# Altium PCB Dogfish3D R1.0.PcbDoc (part 1 of 2)
Units mil, origin at the board's own origin, x right, y up, seen from the top; angles counter-clockwise.
Board outline 6000 x 4000 mil, 4 copper layers (Top Layer, Groun Plane, Power Plane, Bottom Layer), stack 61.73 mil thick; 227 components, 145 nets, 705 pads, 165 vias.
Unrouted connection lines stored in the file: 286.
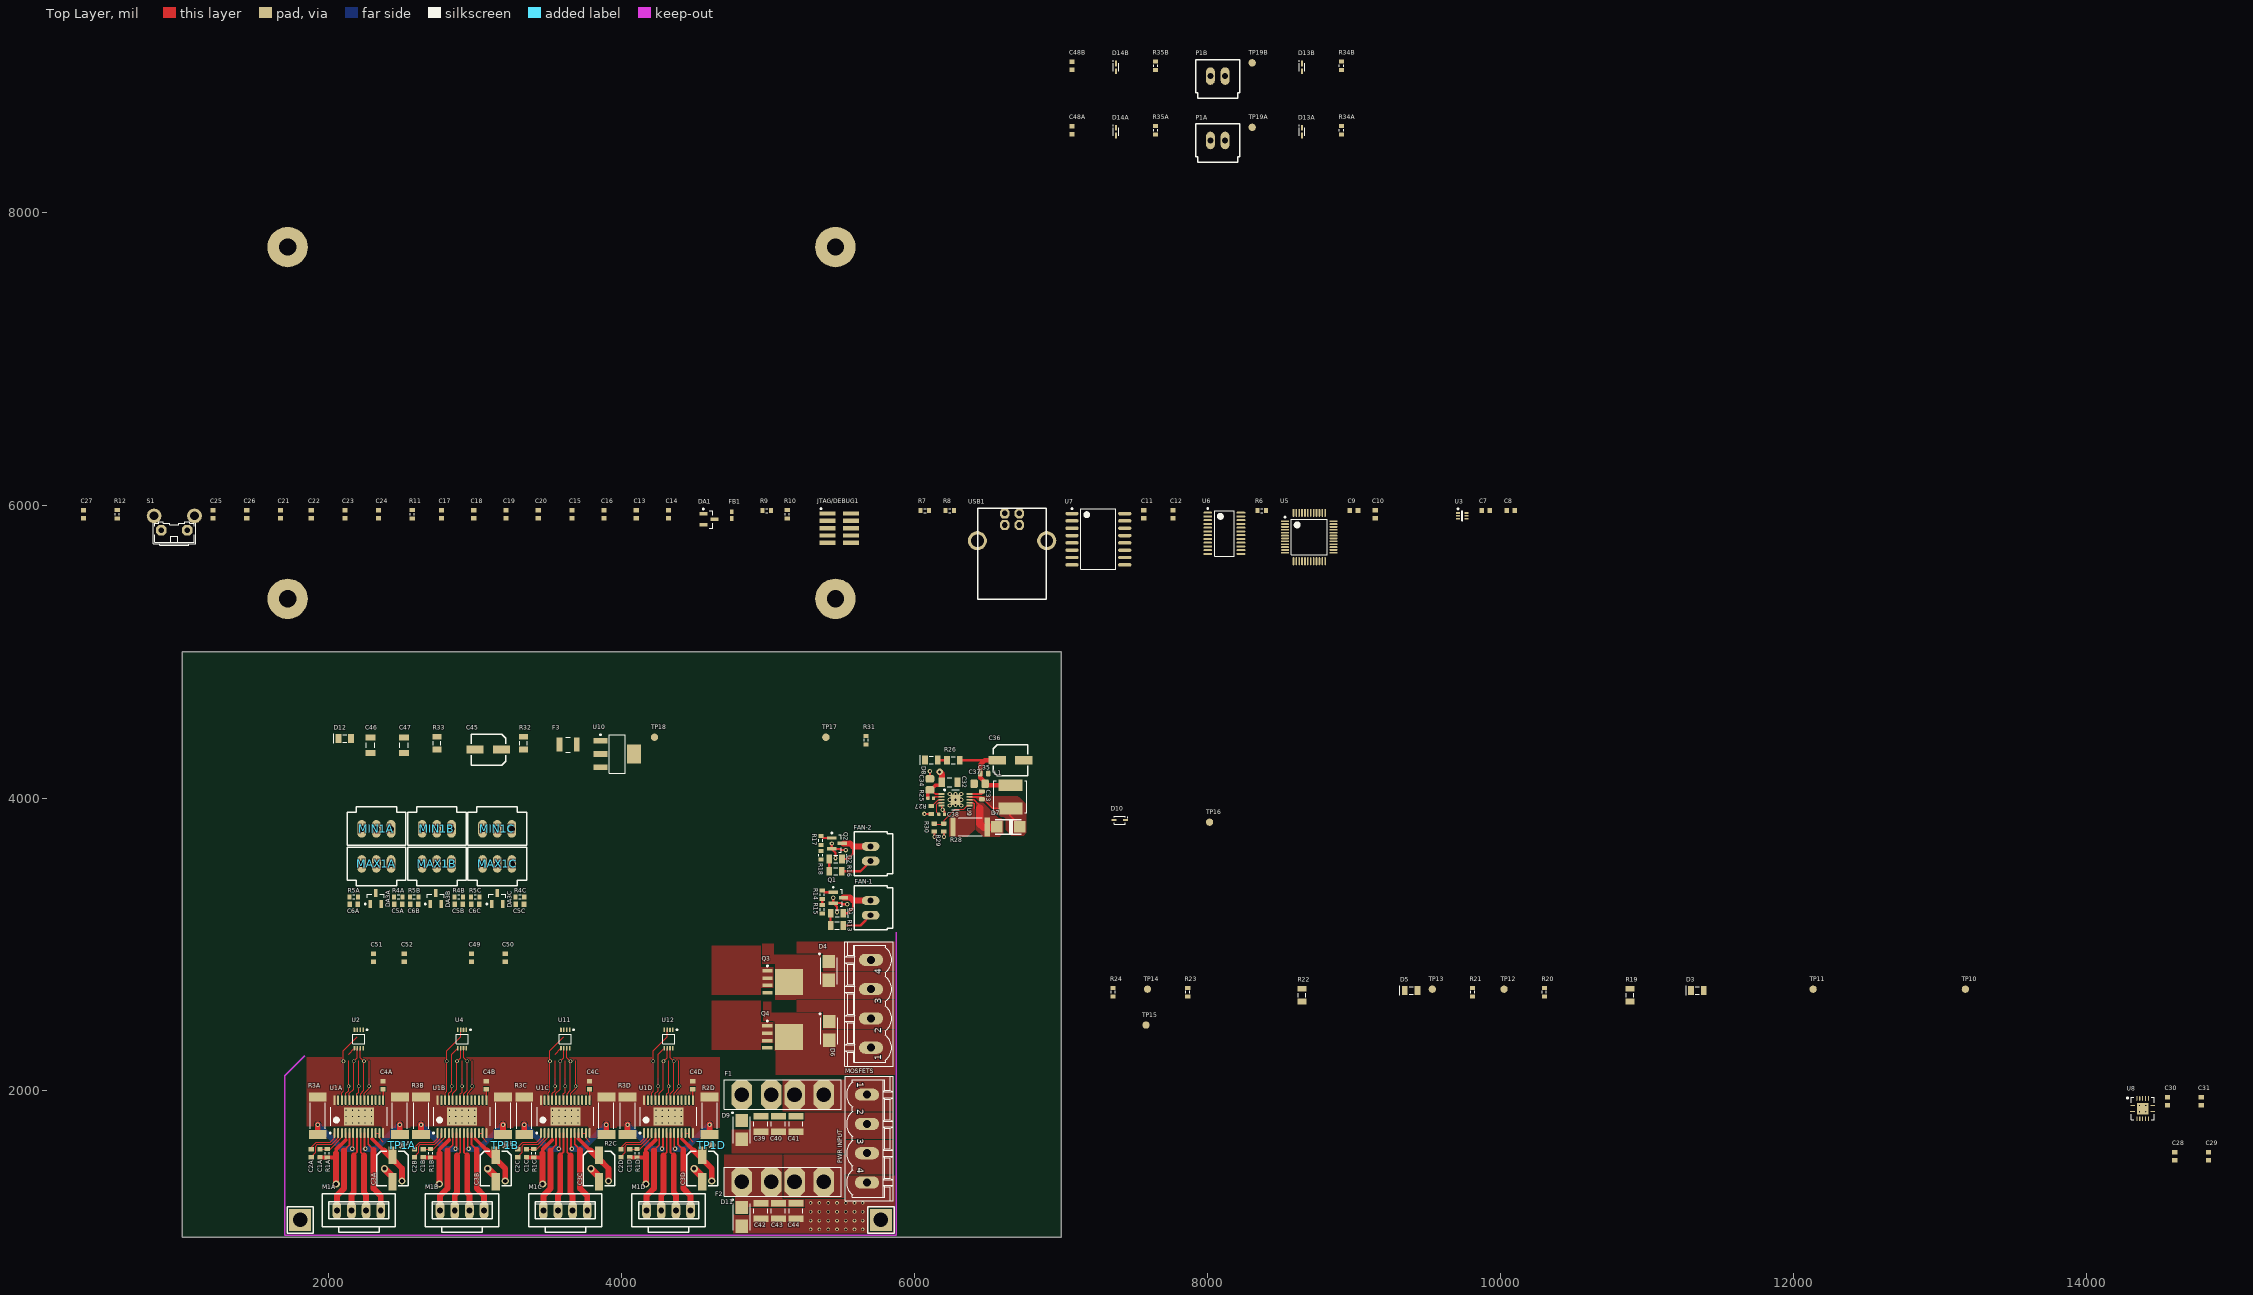
[diagram p0: Top Layer view]
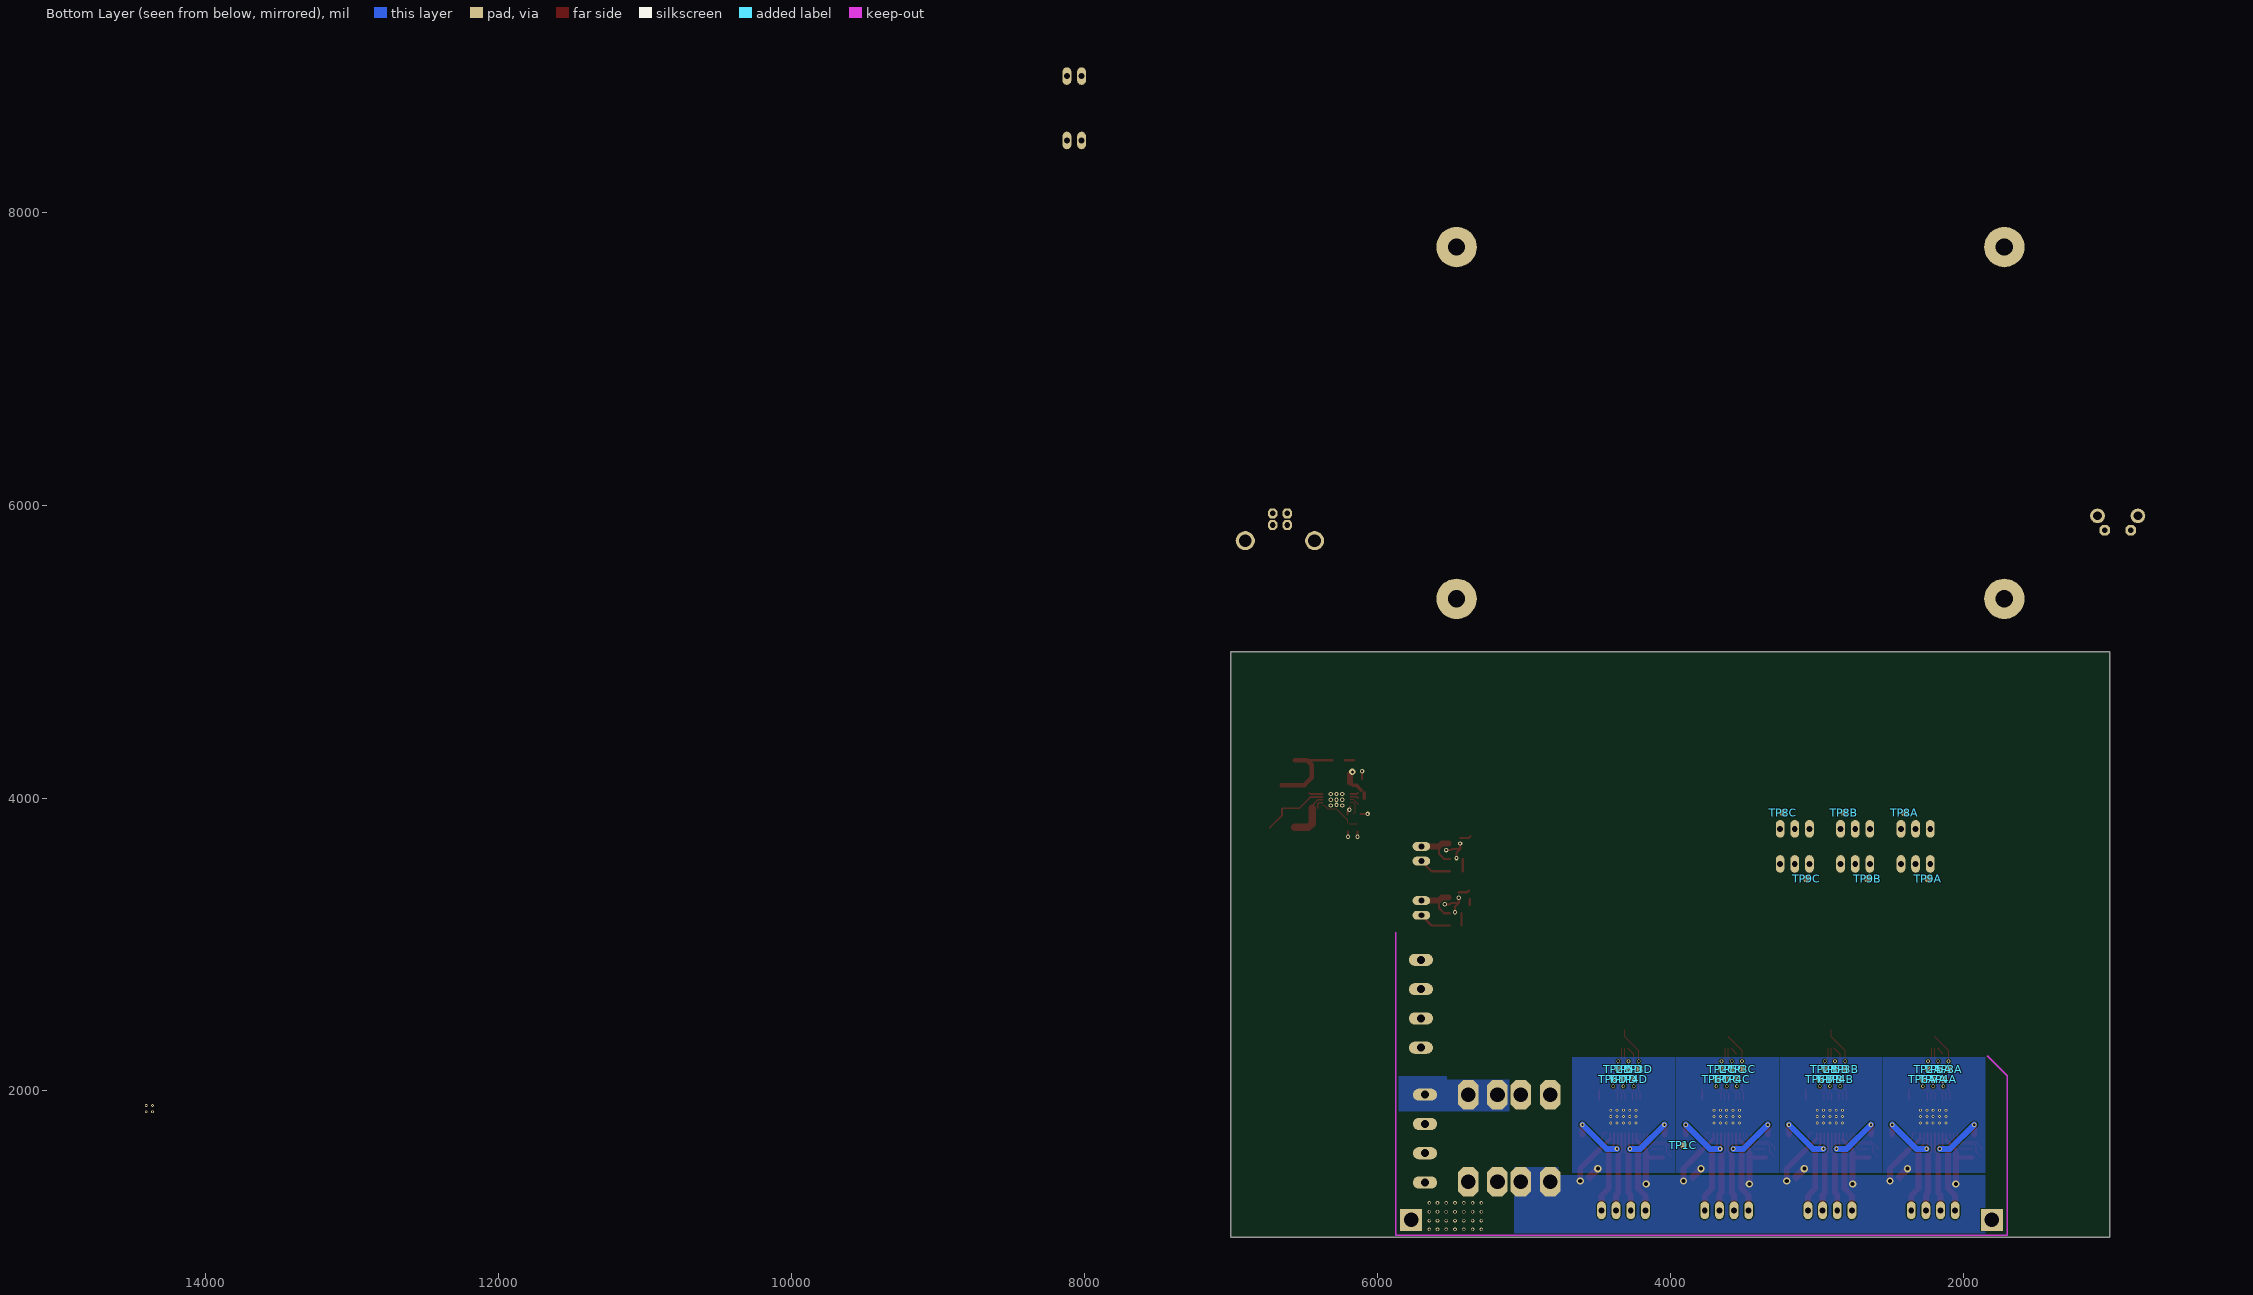
[diagram p1: Bottom Layer view, seen from below]
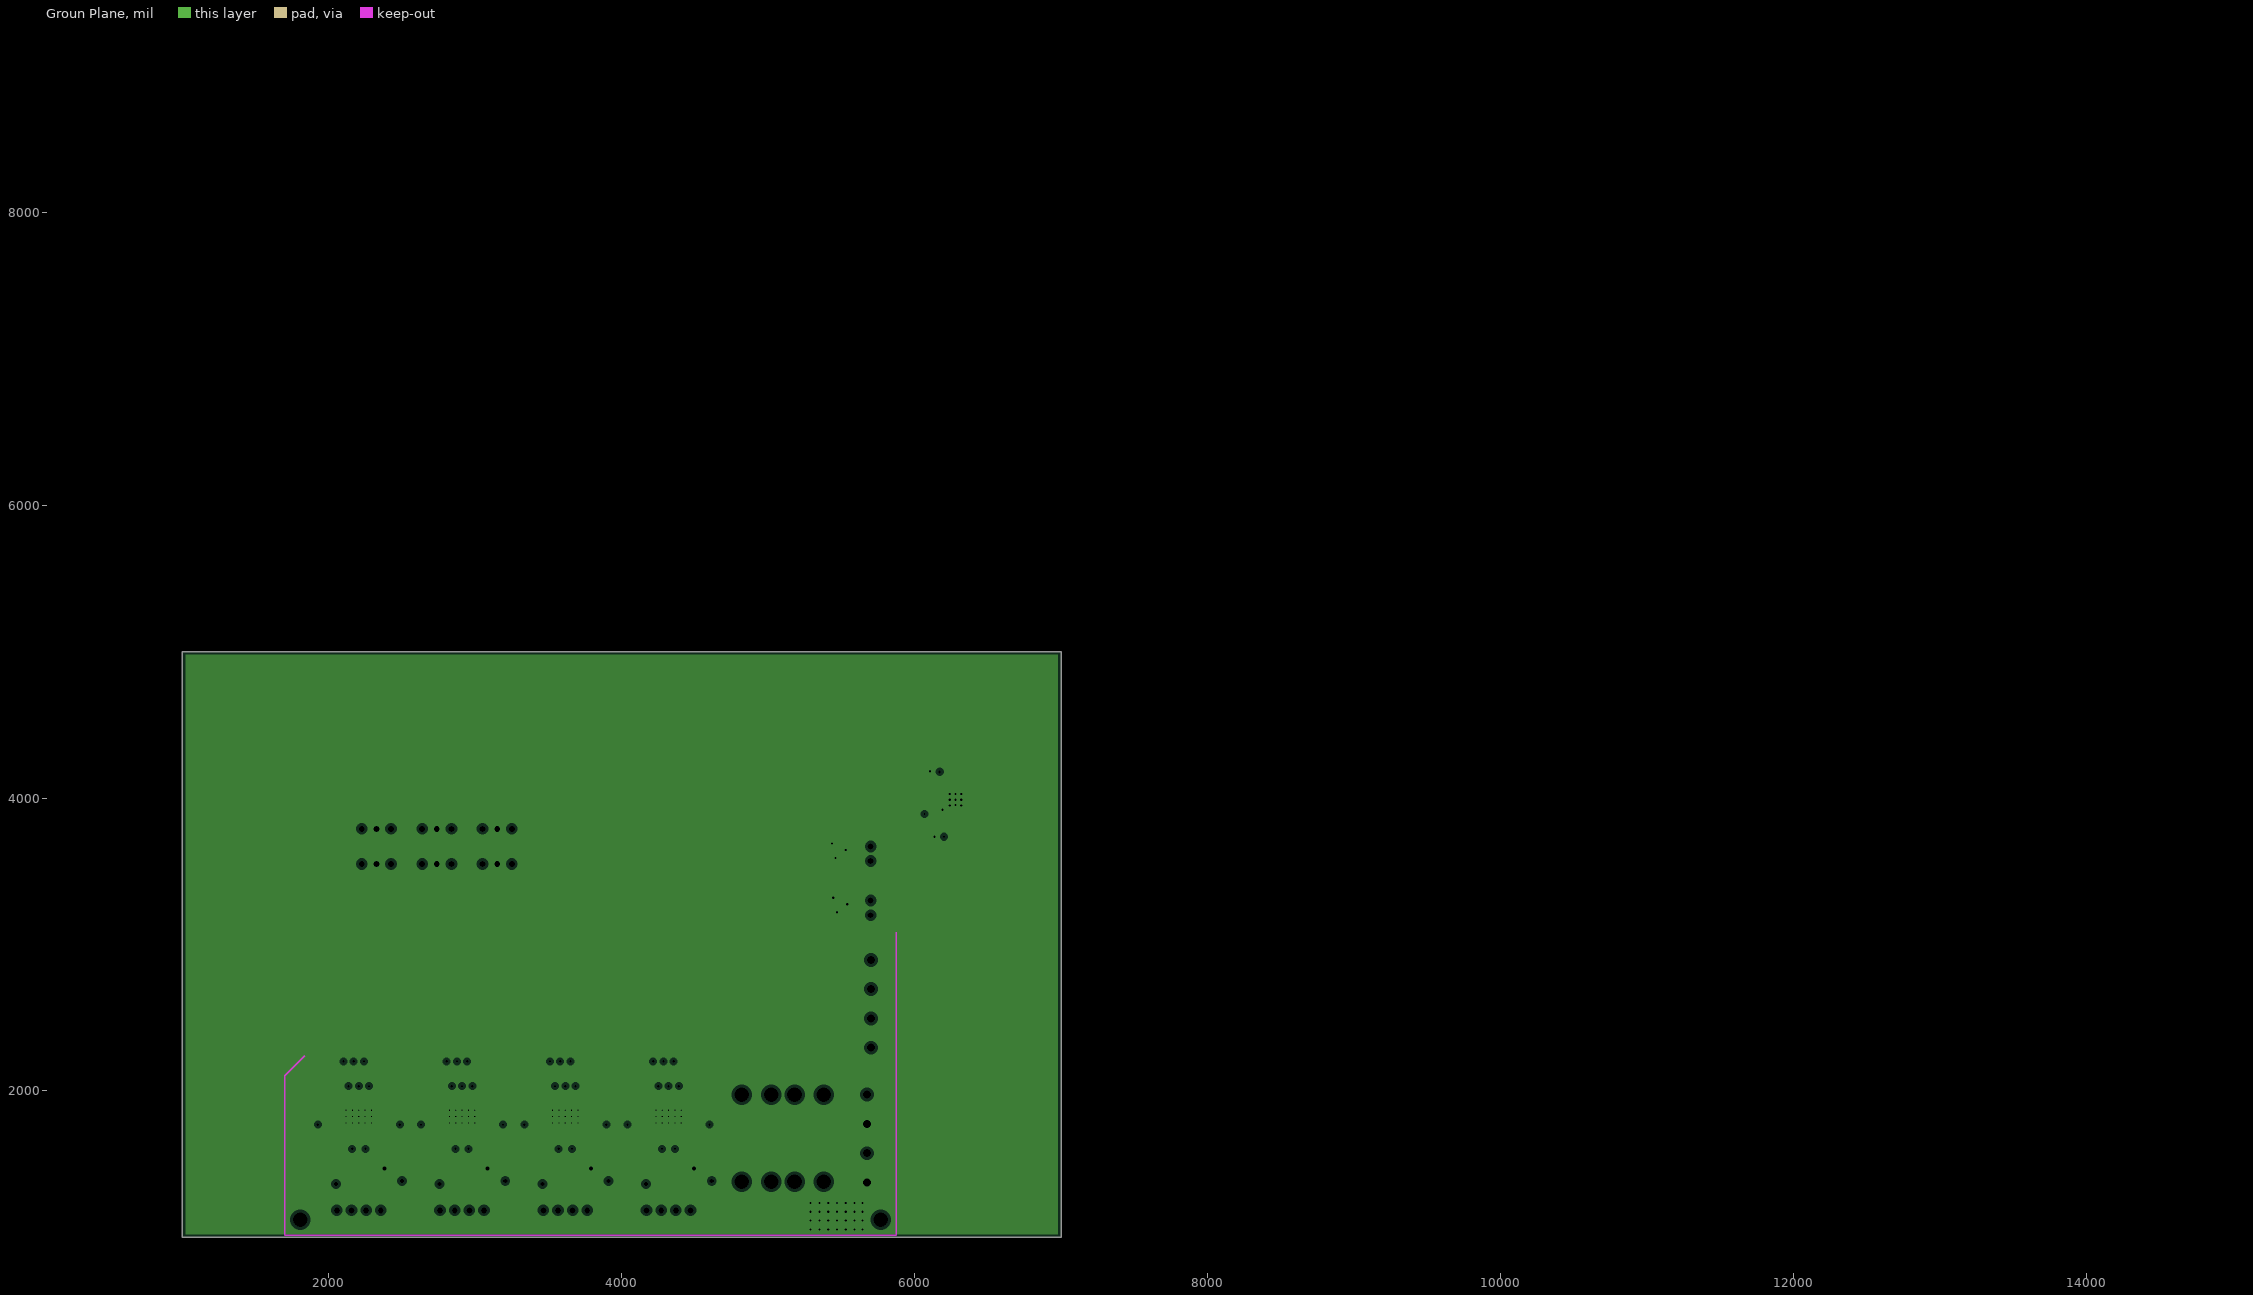
[diagram p2: Groun Plane, clearances drawn from the general rule]
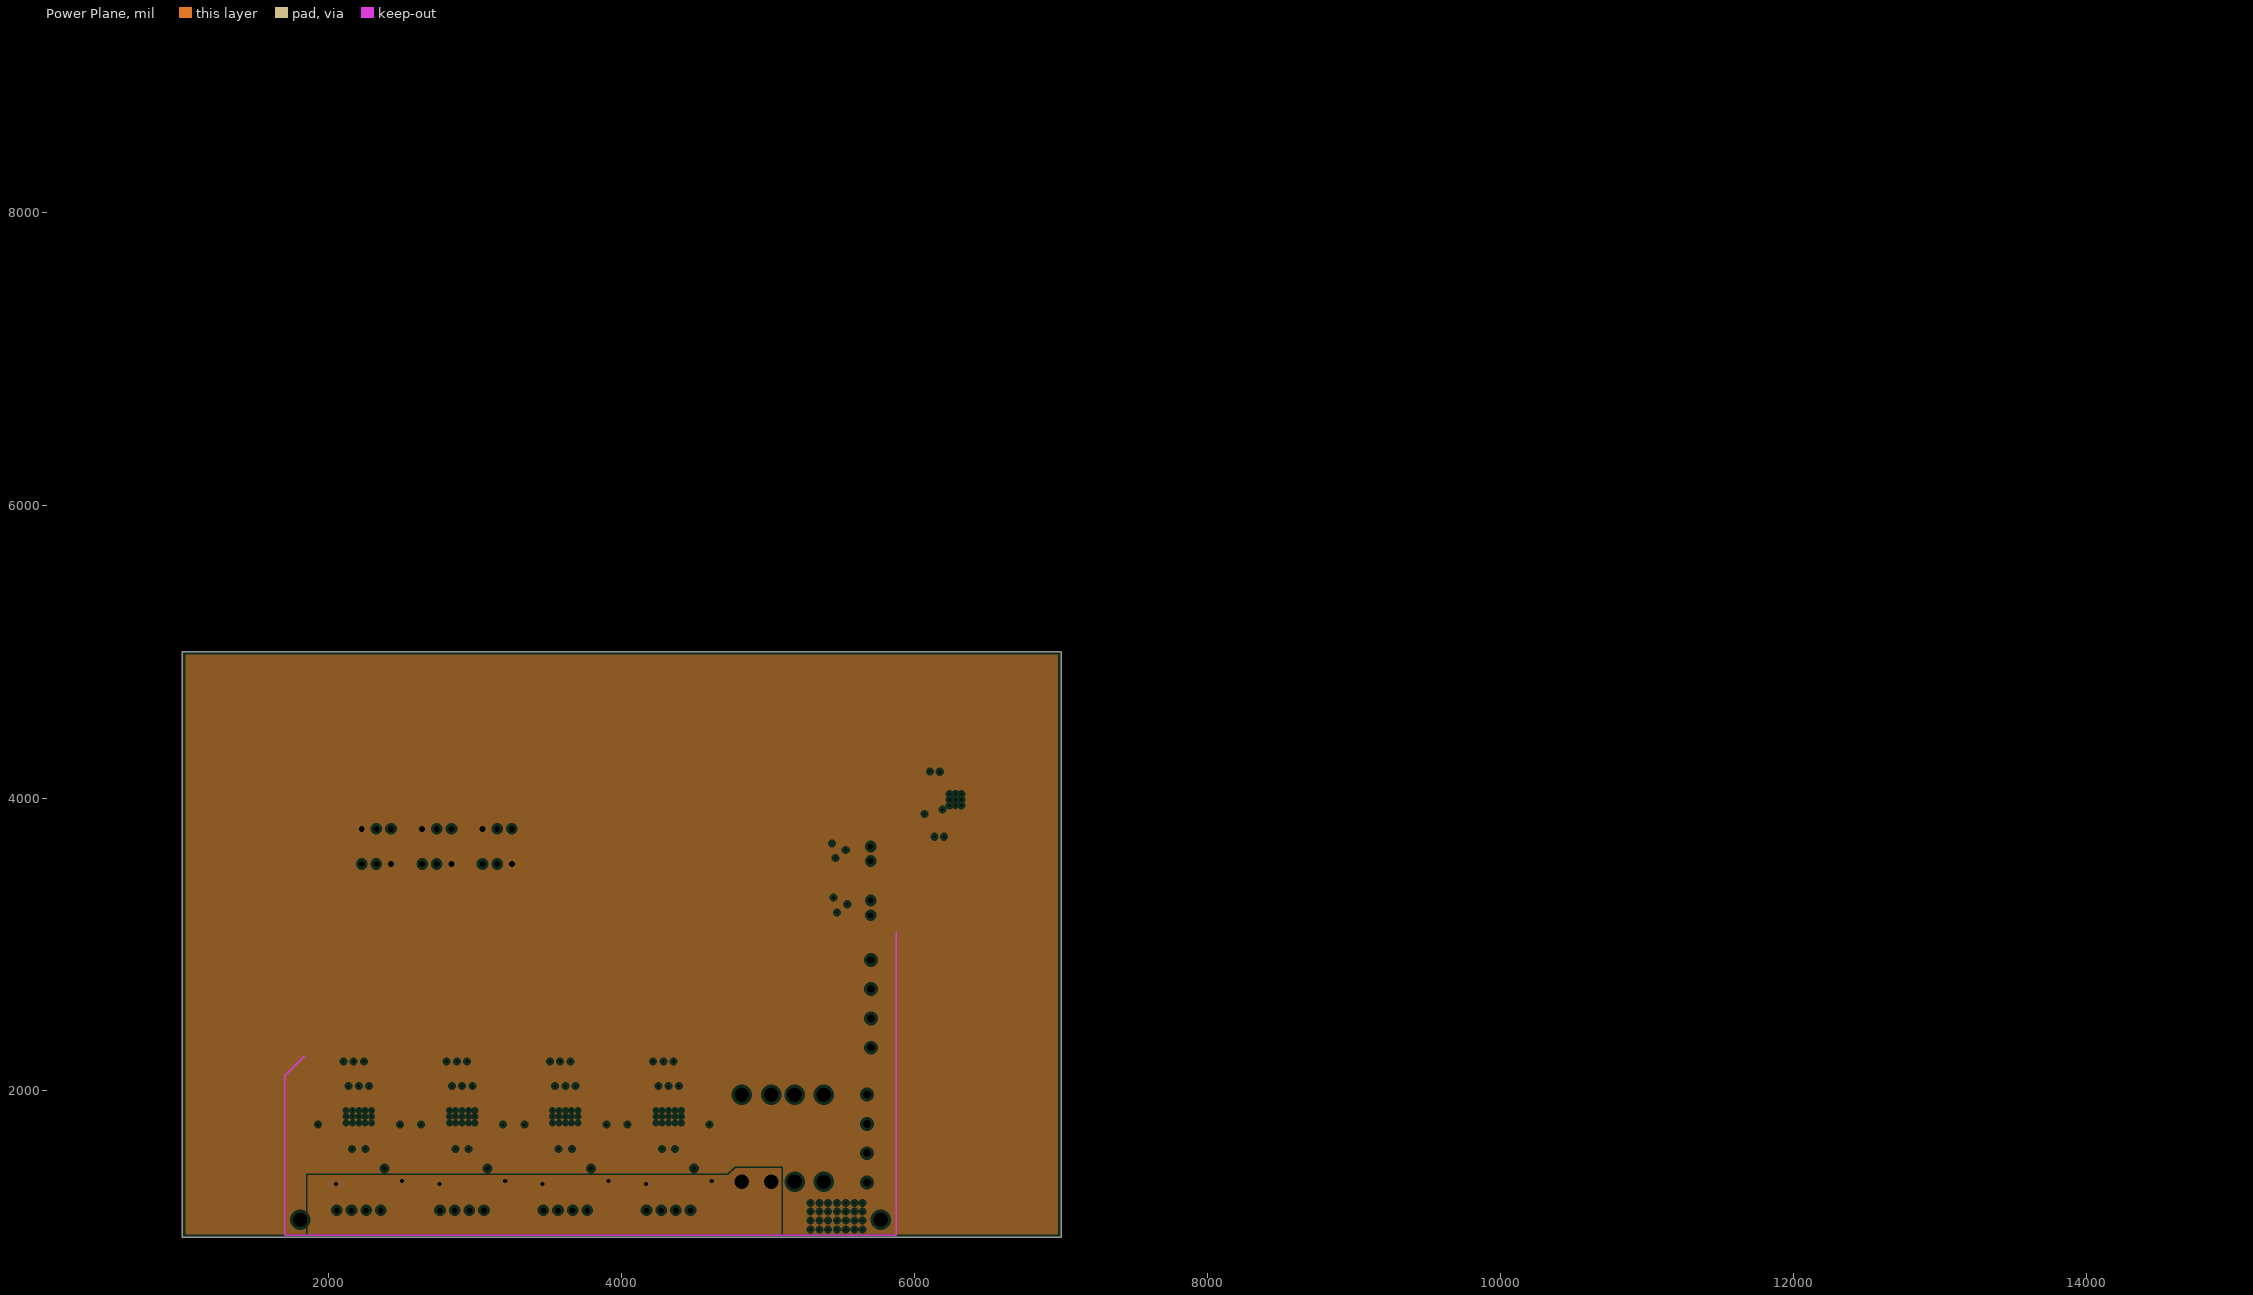
[diagram p3: Power Plane, clearances drawn from the general rule]

## Layer stack, top to bottom
Top Solder: solder mask 0.4, Solder Resist, Dk 3.5
Top Layer: signal copper 2.75
Dielectric1: prepreg 21.654, FR-4, Dk 4.2
Groun Plane: plane copper 1.4, net GND
Dielectric2: core 10.236, FR-4, Dk 4.2
Power Plane: plane copper 1.4, net (Multiple Nets)
Dielectric3: prepreg 21.54, FR-4, Dk 4.2
Bottom Layer: signal copper 2.75
Bottom Solder: solder mask 0.4, Solder Resist, Dk 3.5

## Board outline
1000,1000 7000,1000 7000,5000 1000,5000

## Design rules (kind name [scope] priority, off if disabled: settings)
Clearance [All] p1: gap=7
DiffPairsRouting [All] p1: maxlimit=10 minlimit=10 mostfreqgap=10 toplayer_minwidth=15 toplayer_maxwidth=15 toplayer_prefwidth=15 bottomlayer_minwidth=15 bottomlayer_maxwidth=15 bottomlayer_prefwidth=15 maxuncoupledlength=500
PlaneClearance [All] p1: clearance=20
PlaneConnect [All] p1: planeconnectstyle=Direct reliefexpansion=20 reliefentries=4 reliefconductorwidth=10 reliefairgap=10
PolygonConnect [All] p1: connectstyle=Direct reliefconductorwidth=10 reliefentries=4 polygonreliefangle="90 Angle" airgapwidth=10
RoomDefinition Dogfish3D-DriverChannelD [InComponentClass('Dogfish3D-DriverChannelD')] p1: confinementstyle=ConfineIn formatcopy=TRUE lockcomponents=FALSE outline 4670,1025 4670,2230 3965,2230 3965,1025
RoomDefinition U_Dogfish3D-ThermistorChannelB [InComponentClass('U_Dogfish3D-ThermistorChannelB')] p2: confinementstyle=ConfineIn formatcopy=TRUE lockcomponents=FALSE outline 7045,8770 9140,8770 9140,9155 7045,9155
RoomDefinition U_Dogfish3D-ThermistorChannelA [InComponentClass('U_Dogfish3D-ThermistorChannelA')] p3: confinementstyle=ConfineIn formatcopy=TRUE lockcomponents=FALSE outline 7045,8330 9140,8330 9140,8715 7045,8715
RoomDefinition Dogfish3D-DriverChannelC [InComponentClass('Dogfish3D-DriverChannelC')] p4: confinementstyle=ConfineIn formatcopy=TRUE lockcomponents=FALSE outline 3965,1025 3965,2230 3260,2230 3260,1025
RoomDefinition Dogfish3D-DriverChannelB [InComponentClass('Dogfish3D-DriverChannelB')] p5: confinementstyle=ConfineIn formatcopy=TRUE lockcomponents=FALSE outline 3260,1025 3260,2230 2555,2230 2555,1025
RoomDefinition Dogfish3D-DriverChannelA [InComponentClass('Dogfish3D-DriverChannelA')] p6: confinementstyle=ConfineIn formatcopy=TRUE lockcomponents=FALSE outline 2555,1025 2555,2230 1850,2230 1850,1025
RoutingVias [All] p1: holewidth=15 width=25 viastyle="Through Hole" minholewidth=15 minwidth=25 maxholewidth=28 maxwidth=50
SolderMaskExpansion [All] p1: expansion=4
UnpouredPolygon [All] p1: allowunpoured=FALSE
Width [All] p1: maxlimit=50 minlimit=7 preferedwidth=8
26 further rules are at their usual default settings.

## Classes and differential pairs
channel class "Dogfish3D - Thermistor Channel": U_Dogfish3D-ThermistorChannel1 U_Dogfish3D-ThermistorChannel2
channel class "Dogfish3D - Endstop Channel": U_Dogfish3D-EndstopChannel1 U_Dogfish3D-EndstopChannel2 U_Dogfish3D-EndstopChannel3
channel class "Dogfish3D - Driver Channel": Dogfish3D-DriverChannel1 Dogfish3D-DriverChannel2 Dogfish3D-DriverChannel3
net class THERM_AN_BUS[1..2]: THERM_AN_BUS1 THERM_AN_BUS2
net class STEP_BUS[1..4]: STEP_BUS1 STEP_BUS2 STEP_BUS3
net class REF_BUS[1..4]: REF_BUS1 REF_BUS2 REF_BUS3
net class MOD2E_BUS[1..4]: MOD2E_BUS1 MOD2E_BUS2 MOD2E_BUS3
net class MOD1E_BUS[1..4]: MOD1E_BUS1 MOD1E_BUS2 MOD1E_BUS3
net class MOD0E_BUS[1..4]: MOD0E_BUS1 MOD0E_BUS2 MOD0E_BUS3
net class MIN_ES_BUS[1..2]: MIN_ES_BUS1 MIN_ES_BUS2
net class MAX_ES_BUS[1..2]: MAX_ES_BUS1 MAX_ES_BUS2
net class EN_BUS[1..4]: EN_BUS1 EN_BUS2 EN_BUS3
net class DIR_BUS[1..4]: DIR_BUS1 DIR_BUS2 DIR_BUS3
component class Dogfish3D-DriverChannelD: C1D C2D C3D C4D M1D R1D R2D R3D TP1D TP2D TP3D TP4D TP5D TP6D TP7D U1D
component class U_Dogfish3D-ThermistorChannelB: C48B D13B D14B P1B R34B R35B TP19B
component class U_Dogfish3D-ThermistorChannelA: C48A D13A D14A P1A R34A R35A TP19A
component class "U_Dogfish3D - Power": C32 C33 C34 C35 C36 C37 C38 C39 C40 C41 C42 C43 C44 C45 C46 C47 D7 D8 D9 D10 D11 D12 F1 F2 F3 L1 "PWR INPUT" R25 R26 R27 R28 R29 R30 R31 R32 R33 TP16 TP17 TP18 U9 U10
component class "U_Dogfish3D - MOSFETs and Driver": C28 C29 C30 C31 D1 D2 D3 D4 D5 D6 FAN-1 FAN-2 MOSFETS Q1 Q2 Q3 Q4 R13 R14 R15 R16 R17 R18 R19 R20 R21 R22 R23 R24 TP10 TP11 TP12 TP13 TP14 TP15 U8
component class "U_Dogfish3D - MCU - ATSAMD21G18": C7 C8 C9 C10 C11 C12 C13 C14 C15 C16 C17 C18 C19 C20 C21 C22 C23 C24 C25 C26 C27 C49 C50 C51 C52 DA1 FB1 JTAG/DEBUG1 R6 R7 R8 R9 R10 R11 R12 S1 U2 U3 U4 U5 U6 U7 U11 U12 USB1
component class U_Dogfish3D-EndstopChannelC: C5C C6C DA3C MAX1C MIN1C R4C R5C TP8C TP9C
component class U_Dogfish3D-EndstopChannelB: C5B C6B DA3B MAX1B MIN1B R4B R5B TP8B TP9B
component class U_Dogfish3D-EndstopChannelA: C5A C6A DA3A MAX1A MIN1A R4A R5A TP8A TP9A
component class Dogfish3D-DriverChannelC: C1C C2C C3C C4C M1C R1C R2C R3C TP1C TP2C TP3C TP4C TP5C TP6C TP7C U1C
component class Dogfish3D-DriverChannelB: C1B C2B C3B C4B M1B R1B R2B R3B TP1B TP2B TP3B TP4B TP5B TP6B TP7B U1B
component class Dogfish3D-DriverChannelA: C1A C2A C3A C4A M1A R1A R2A R3A TP1A TP2A TP3A TP4A TP5A TP6A TP7A U1A
differential pair UMCU: +UMCU_P -UMCU_N
differential pair UI: +UI_P -UI_N
differential pair UD: +UD_P -UD_N
differential pair R: +R_P -R_N

## Components (designator, comment, footprint, x,y, rotation, side; value= is the part's Value field where it differs from the comment)
C1A "0603" 1608[0603] 1940,1575 r90 top (schematic designator C1)
C1B "0603" 1608[0603] 2645,1575 r90 top (schematic designator C1)
C1C "0603" 1608[0603] 3350,1575 r90 top (schematic designator C1)
C1D "0603" 1608[0603] 4055,1575 r90 top (schematic designator C1)
C2A "0603" 1608[0603] 1880,1575 r270 top (schematic designator C2)
C2B "0603" 1608[0603] 2585,1575 r270 top (schematic designator C2)
C2C "0603" 1608[0603] 3290,1575 r270 top (schematic designator C2)
C2D "0603" 1608[0603] 3995,1575 r270 top (schematic designator C2)
C3A "VS C" "Panasonic VS C" 2550,1350 r90 top (schematic designator C3)
C3B "VS C" "Panasonic VS C" 3255,1350 r90 top (schematic designator C3)
C3C "VS C" "Panasonic VS C" 3960,1350 r90 top (schematic designator C3)
C3D "VS C" "Panasonic VS C" 4665,1350 r90 top (schematic designator C3)
C4A "0603" 1608[0603] 2370,2040 r270 top (schematic designator C4)
C4B "0603" 1608[0603] 3075,2040 r270 top (schematic designator C4)
C4C "0603" 1608[0603] 3780,2040 r270 top (schematic designator C4)
C4D "0603" 1608[0603] 4485,2040 r270 top (schematic designator C4)
C5A "0603" 1608[0603] 2475,3275 r180 top (schematic designator C5)
C5B "0603" 1608[0603] 2887.56,3275 r180 top (schematic designator C5)
C5C "0603" 1608[0603] 3305,3275 r180 top (schematic designator C5)
C6A "0603" 1608[0603] 2170,3275 r180 top (schematic designator C6)
C6B "0603" 1608[0603] 2582.56,3275 r180 top (schematic designator C6)
C6C "0603" 1608[0603] 3000,3275 r180 top (schematic designator C6)
C7 "0603" 1608[0603] 9900,5962.56 r0 top
C8 "0603" 1608[0603] 10070,5962.56 r0 top
C9 "0603" 1608[0603] 9000,5962.56 r0 top
C10 "0603" 1608[0603] 9145,5937.56 r90 top
C11 "0603" 1608[0603] 7565,5937.56 r90 top
C12 "0603" 1608[0603] 7765,5937.56 r90 top
C13 "0603" 1608[0603] 4100,5937.56 r90 top
C14 "0603" 1608[0603] 4320,5937.56 r90 top
C15 "0603" 1608[0603] 3660,5937.56 r90 top
C16 "0603" 1608[0603] 3880,5937.56 r90 top
C17 "0603" 1608[0603] 2770,5937.56 r90 top
C18 "0603" 1608[0603] 2990,5937.56 r90 top
C19 "0603" 1608[0603] 3210,5937.56 r90 top
C20 "0603" 1608[0603] 3430,5937.56 r90 top
C21 "0603" 1608[0603] 1670,5937.56 r90 top
C22 "0603" 1608[0603] 1880,5937.56 r90 top
C23 "0603" 1608[0603] 2110,5937.56 r90 top
C24 "0603" 1608[0603] 2340,5937.56 r90 top
C25 "0603" 1608[0603] 1210,5937.56 r90 top
C26 "0603" 1608[0603] 1440,5937.56 r90 top
C27 "Cap Semi" 1608[0603] 325,5937.56 r90 top
C28 "0603" 1608[0603] 14605,1555 r90 top
C29 "0603" 1608[0603] 14835,1555 r90 top
C30 "0603" 1608[0603] 14555,1930 r90 top
C31 "0603" 1608[0603] 14785,1930 r90 top
C32 "4.7uF" C1206 6239.31,4108.43 r0 top
C33 "100nF" C0603 6459.31,4018.43 r270 top
C34 "1uF" C0805 6104.31,4093.43 r90 top
C35 "100nF" C0603 6475.31,4167.43 r0 top
C36 "VS C" "Panasonic VS C" 6774.31,4373.43 r180 top
C37 "10uF" C0805 6444.31,4098.43 r180 top
C38 "1uF" C0402 6184.31,3888.43 r0 top
C39 "1210" C1210 4950,1775 r90 top
C40 "1210" C1210 5070,1775 r90 top
C41 "1210" C1210 5190,1775 r90 top
C42 "1210" C1210 4950,1180 r90 top
C43 "1210" C1210 5070,1180 r90 top
C44 "1210" C1210 5190,1180 r90 top
C45 "VS C" "Panasonic VS C" 2969.17,4215.55 r0 top
C46 "1206" C1206 2284.17,4360.55 r90 top
C47 "1206" C1206 2514.17,4360.55 r90 top
C48A "Cap Semi" 1608[0603] 7075,8560 r90 top (schematic designator C48)
C48B "Cap Semi" 1608[0603] 7075,9000 r90 top (schematic designator C48)
C49 "0603" 1608[0603] 2975,2910 r90 top
C50 "0603" 1608[0603] 3205,2910 r90 top
C51 "0603" 1608[0603] 2305,2910 r90 top
C52 "0603" 1608[0603] 2515,2910 r90 top
D1 "LED1" "SM 0805 polarized" 5550,3170 r180 top
D2 "LED1" "SM 0805 polarized" 5540,3540 r180 top
D3 "LED1" "SM 0805 polarized" 11265,2730 r0 top
D4 "B240A-13-F" SK310A-TP 5415,2820 r90 top
D5 "LED1" "SM 0805 polarized" 9310,2730 r0 top
D6 "B240A-13-F" SK310A-TP 5417.84,2410.36 r90 top
D7 "SK310A-TP" SMA-SM 6639.31,3803.43 r180 top
D8 "LED2" "SM 0805 polarized" 6034.31,4303.43 r0 top
D9 "SK310A-TP" SK310A-TP 4820,1735 r90 top
D10 "SZMM3Z4V7T1G" SZMM3Z4V7T1G 7400,3850 r0 top
D11 "SK310A-TP" SK310A-TP 4820,1140 r90 top
D12 "LED2" "SM 0805 polarized" 2029.17,4450.55 r0 top
D13A "Diode 1N4148" 1N4148WT 8645,8550 r90 top (schematic designator D13)
D13B "Diode 1N4148" 1N4148WT 8645,8990 r90 top (schematic designator D13)
D14A "Diode 1N4148" 1N4148WT 7375,8550 r90 top (schematic designator D14)
D14B "Diode 1N4148" 1N4148WT 7375,8990 r90 top (schematic designator D14)
DA1 "PESDxL2BT" SOT95P230X110-3N 4595,5902.56 r0 top
DA3A "PESDxL2BT" SOT95P230X110-3N 2320,3315 r90 top (schematic designator DA3)
DA3B "PESDxL2BT" SOT95P230X110-3N 2730,3315 r90 top (schematic designator DA3)
DA3C "PESDxL2BT" SOT95P230X110-3N 3150,3315 r90 top (schematic designator DA3)
F1 "3522-2" "3522-2 - WAVE SOLDER" 5100,1975 r180 top
F2 "3522-2" "3522-2 - WAVE SOLDER" 5100,1380 r180 top
F3 "LittleFuse F1210" F1210_M 3634.17,4365.55 r0 top
FAN-1 "Molex 70543-02" 70543-02 5700,3250 r90 top
FAN-2 "Molex 70543-02" 70543-02 5700,3620 r90 top
FB1 "BLM15HG601SN1D" BLM18PG121SN1D 4750,5932.56 r90 top
JTAG/DEBUG1 "FTSH-105-XX-X-DV" FTSH-105-XX-X-DV 5485,5842.56 r90 top
L1 "XAL5050-153MEB" XAL50xx-153 6654.31,4008.43 r90 top
M1A "Molex 0705430003" 4POL254 2205,1185 r0 top (schematic designator M1)
M1B "Molex 0705430003" 4POL254 2910,1185 r0 top (schematic designator M1)
M1C "Molex 0705430003" 4POL254 3615,1185 r0 top (schematic designator M1)
M1D "Molex 0705430003" 4POL254 4320,1185 r0 top (schematic designator M1)
MAX1A "Molex 70543-03" 70543-03 2325,3550 r0 top (schematic designator MAX1)
MAX1B "Molex 70543-03" 70543-03 2737.56,3550 r0 top (schematic designator MAX1)
MAX1C "Molex 70543-03" 70543-03 3150,3550 r0 top (schematic designator MAX1)
MIN1A "Molex 70543-03" 70543-03 2325,3790 r180 top (schematic designator MIN1)
MIN1B "Molex 70543-03" 70543-03 2737.56,3790 r180 top (schematic designator MIN1)
MIN1C "Molex 70543-03" 70543-03 3150,3790 r180 top (schematic designator MIN1)
MOSFETS "con-phoenix-508 - 4" MSTBV4 5702.84,2595.36 r90 top
P1A "Molex 70543-02" 70543-02 8070,8490 r0 top (schematic designator P1)
P1B "Molex 70543-02" 70543-02 8070,8930 r0 top (schematic designator P1)
"PWR INPUT" "con-phoenix-508 - 4" MSTBV4 5675,1675 r270 top
Q1 "IRML6346TRPBF" IRLML6346 5480,3320 r0 top
Q2 "IRML6346TRPBF" IRLML6346 5470,3690 r0 top
Q3 "PSMN7R0-60YS" PSMN7R0-60YS 5097.84,2745.36 r0 top
Q4 "PSMN7R0-60YS" PSMN7R0-60YS 5096.89,2369.36 r0 top
R1A "0603" J1-0603 1990,1575 r90 top (schematic designator R1)
R1B "0603" J1-0603 2695,1575 r90 top (schematic designator R1)
R1C "0603" J1-0603 3400,1575 r90 top (schematic designator R1)
R1D "0603" J1-0603 4105,1575 r90 top (schematic designator R1)
R2A "2512" Resistor2512 2485,1830 r270 top (schematic designator R2)
R2B "2512" Resistor2512 3190,1830 r270 top (schematic designator R2)
R2C "2512" Resistor2512 3895,1830 r270 top (schematic designator R2)
R2D "2512" Resistor2512 4600,1830 r270 top (schematic designator R2)
R3A "2512" Resistor2512 1925,1830 r270 top (schematic designator R3)
R3B "2512" Resistor2512 2630,1830 r270 top (schematic designator R3)
R3C "2512" Resistor2512 3335,1830 r270 top (schematic designator R3)
R3D "2512" Resistor2512 4040,1830 r270 top (schematic designator R3)
R4A "0603" J1-0603 2475,3325 r0 top (schematic designator R4)
R4B "0603" J1-0603 2887.56,3325 r0 top (schematic designator R4)
R4C "0603" J1-0603 3305,3325 r0 top (schematic designator R4)
R5A "0603" J1-0603 2170,3325 r0 top (schematic designator R5)
R5B "0603" J1-0603 2582.56,3325 r0 top (schematic designator R5)
R5C "0603" J1-0603 3000,3325 r0 top (schematic designator R5)
R6 "Res3" J1-0603 8370,5962.56 r0 top
R7 "0603" J1-0603 6070,5962.56 r0 top
R8 "0603" J1-0603 6240,5962.56 r0 top
R9 "0603" J1-0603 4990,5962.56 r0 top
R10 "0603" J1-0603 5130,5937.56 r90 top
R11 "Res3" J1-0603 2570,5937.56 r90 top
R12 "Res3" J1-0603 555,5937.56 r90 top
R13 "0805" "SM 0805 - gap trimmed" 5470,3130 r180 top
R14 "0603" J1-0603 5370,3340 r90 top
R15 "0603" J1-0603 5370,3240 r270 top
R16 "0805" "SM 0805 - gap trimmed" 5460,3500 r180 top
R17 "0603" J1-0603 5360,3710 r90 top
R18 "0603" J1-0603 5360,3610 r270 top
R19 "0805" "SM 0805 - gap trimmed" 10885,2655 r90 top
R20 "0603" J1-0603 10300,2675 r90 top
R21 "0603" J1-0603 9810,2675 r90 top
R22 "0805" "SM 0805 - gap trimmed" 8645,2655 r90 top
R23 "0603" J1-0603 7865,2675 r90 top
R24 "0603" J1-0603 7355,2675 r90 top
R25 "200K" R0402 6109.31,3998.43 r180 top
R26 "Res3" "SM 0805 - gap trimmed" 6264.31,4258.43 r0 top
R27 "10K" R0603 6114.31,3918.43 r270 top
R28 "0.6r" 2512R-0.55 6379.31,3803.43 r0 top
R29 "10K" R0603 6199.31,3798.43 r90 top
R30 "10K" R0603 6134.31,3798.43 r270 top
R31 "Res3" J1-0603 5669.17,4395.55 r90 top
R32 "Res3" "SM 0805 - gap trimmed" 3329.17,4375.55 r90 top
R33 "Res3" "SM 0805 - gap trimmed" 2739.17,4375.55 r90 top
R34A "Res3" J1-0603 8915,8560 r90 top (schematic designator R34)
R34B "Res3" J1-0603 8915,9000 r90 top (schematic designator R34)
R35A "Res3" J1-0603 7645,8560 r90 top (schematic designator R35)
R35B "Res3" J1-0603 7645,9000 r90 top (schematic designator R35)
S1 "1571610-2" B3F-31XX 945,5877.56 r0 top
TP1A "TP4" TP-2#1 2500,1630 r270 top (schematic designator TP1)
TP1B "TP4" TP-2#1 3205,1630 r270 top (schematic designator TP1)
TP1C "TP4" TP-2#2 3910,1630 r270 top (schematic designator TP1)
TP1D "TP4" TP-2#1 4615,1630 r270 top (schematic designator TP1)
TP2A "TP4" TP-2#1 2240,2150 r0 bottom (schematic designator TP2)
TP2B "TP4" TP-2#1 2945,2150 r0 bottom (schematic designator TP2)
TP2C "TP4" TP-2#1 3650,2150 r0 bottom (schematic designator TP2)
TP2D "TP4" TP-2#1 4355,2150 r0 bottom (schematic designator TP2)
TP3A "TP4" TP-2#1 2100,2150 r90 bottom (schematic designator TP3)
TP3B "TP4" TP-2#1 2805,2150 r90 bottom (schematic designator TP3)
TP3C "TP4" TP-2#1 3510,2150 r90 bottom (schematic designator TP3)
TP3D "TP4" TP-2#1 4215,2150 r90 bottom (schematic designator TP3)
TP4A "TP4" TP-2#1 2135,2080 r0 bottom (schematic designator TP4)
TP4B "TP4" TP-2#1 2840,2080 r0 bottom (schematic designator TP4)
TP4C "TP4" TP-2#1 3545,2080 r0 bottom (schematic designator TP4)
TP4D "TP4" TP-2#1 4250,2080 r0 bottom (schematic designator TP4)
TP5A "TP4" TP-2#1 2170,2150 r90 bottom (schematic designator TP5)
TP5B "TP4" TP-2#1 2875,2150 r90 bottom (schematic designator TP5)
TP5C "TP4" TP-2#1 3580,2150 r90 bottom (schematic designator TP5)
TP5D "TP4" TP-2#1 4285,2150 r90 bottom (schematic designator TP5)
TP6A "TP4" TP-2#1 2275,2080 r90 bottom (schematic designator TP6)
TP6B "TP4" TP-2#1 2980,2080 r90 bottom (schematic designator TP6)
TP6C "TP4" TP-2#1 3685,2080 r90 bottom (schematic designator TP6)
TP6D "TP4" TP-2#1 4390,2080 r90 bottom (schematic designator TP6)
TP7A "TP4" TP-2#1 2205,2080 r90 bottom (schematic designator TP7)
TP7B "TP4" TP-2#1 2910,2080 r90 bottom (schematic designator TP7)
TP7C "TP4" TP-2#1 3615,2080 r90 bottom (schematic designator TP7)
TP7D "TP4" TP-2#1 4320,2080 r90 bottom (schematic designator TP7)
TP8A "TP4" TP-2#2 2400,3900 r180 top (schematic designator TP8)
TP8B "TP4" TP-2#2 2812.56,3900 r180 top (schematic designator TP8)
TP8C "TP4" TP-2#2 3230,3900 r180 top (schematic designator TP8)
TP9A "TP4" TP-2#2 2240,3450 r180 top (schematic designator TP9)
TP9B "TP4" TP-2#2 2652.56,3450 r180 top (schematic designator TP9)
TP9C "TP4" TP-2#2 3070,3450 r180 top (schematic designator TP9)
TP10 "TP4" TP-2#1 13175,2695 r90 top
TP11 "TP4" TP-2#1 12135,2695 r90 top
TP12 "TP4" TP-2#1 10025,2695 r90 top
TP13 "TP4" TP-2#1 9535,2695 r90 top
TP14 "TP4" TP-2#1 7590,2695 r90 top
TP15 "TP4" TP-2#1 7580,2450 r90 top
TP16 "TP4" TP-2#1 8014.17,3835.55 r90 top
TP17 "TP4" TP-2#1 5394.17,4415.55 r90 top
TP18 "TP4" TP-2#1 4224.17,4415.55 r90 top
TP19A "TP4" TP-2#1 8305,8580 r90 top (schematic designator TP19)
TP19B "TP4" TP-2#1 8305,9020 r90 top (schematic designator TP19)
U1A "DRV8825" DRV8825 2205,1825 r90 top (schematic designator U1)
U1B "DRV8825" DRV8825 2910,1825 r90 top (schematic designator U1)
U1C "DRV8825" DRV8825 3615,1825 r90 top (schematic designator U1)
U1D "DRV8825" DRV8825 4320,1825 r90 top (schematic designator U1)
U2 "SN74LVC1G139" "Ti DCU (R-PDSO-G8) SOIC - SN74VC1G139" 2205,2355 r270 top
U3 "PMEG2005AEV115" PMEG2005AEV115 9740,5927.56 r0 top
U4 "SN74LVC1G139" "Ti DCU (R-PDSO-G8) SOIC - SN74VC1G139" 2910,2355 r270 top
U5 "ATSAMD21G18" TSQFP50P900X900X120-48N 8695,5782.56 r0 top
U6 "AD5206" "AD5206 & AD5204" 8115,5807.56 r0 top
U7 "ADuM4160" ADuM4160 7255,5767.56 r0 top
U8 "TXS0104E Level Shifter" "RGY  (S-PVQFN-N14)" 14385,1880 r0 top
U9 "LM25011MY/NOPB" VSSOP10 6279.31,3988.43 r0 top
U10 "MIC5209-3.3YS" SOT230P700X190-4N 3969.17,4300.55 r0 top
U11 "SN74LVC1G139" "Ti DCU (R-PDSO-G8) SOIC - SN74VC1G139" 3615,2355 r270 top
U12 "SN74LVC1G139" "Ti DCU (R-PDSO-G8) SOIC - SN74VC1G139" 4320,2355 r270 top
USB1 "USB-B" PN61729 6665,5757.56 r0 top

## Footprints (in the part's own frame and the unit in brackets; to place one, negate y for a bottom-side part, rotate by r counter-clockwise, add the part's x,y. Pads: shape width x height; smd on the part's side, far side on the other; paste and mask are expansions set on the pad)
1N4148WT [mm] "Molded Diode, 2-Leads, Body 1.20x0.80mm, IPC Medium Density"
  rect 1x0.3 smd: 1(-0.675,0) 2(0.675,0)
  silkscreen extent -0.7,-0.5 1.15,0.55, body extent -0.65,-0.45 0.65,0.45, height 0.7
4POL254 [mil]
  oval 60x120 hole 40: 1(-150,0) 2(-50,0) 3(50,0) 4(150,0)
  silkscreen extent -250,-150 250,113, body extent -250,-150 250,113, height 454
1608[0603] [mm] "Chip Capacitor, Body 1.6x0.8mm, IPC High Density"
  rect 0.8x0.9 smd: 1(-0.7,0) 2(0.7,0)
  body extent -0.87,-0.48 0.87,0.48, height 1.3
2512R-0.55 [mm] "2512 Resistor 6.35mm x 3.2mm x 0.55mm"
  rect 0.9x3.3 smd: 1(-2.95,0) 2(2.95,0)
  silkscreen extent -2.1,-1.55 2.1,1.55, body extent -3.22,-1.68 3.22,1.68, height 0.65
"3522-2 - WAVE SOLDER" [mil] "3522-2"
  oct 140x200 hole 100: 1(-280,0) 1(-80,0) 2(80,0) 2(280,0)
  silkscreen extent -400,-100 400,100, body extent -402,-103 402,103, height 709
70543-02 [mil]
  oval 60x120 hole 40: 1(-50,0) 2(50,0)
  silkscreen extent -150,-150 150,113, body extent -150,-150 150,113, height 450
70543-03 [mil]
  oval 60x120 hole 40: 1(-100,0) 2(0,0) 3(100,0)
  silkscreen extent -200,-150 200,113, body extent -200,-150 200,113, height 450
"AD5206 & AD5204" [mm] "SOP, 24-Leads, Body 7.80x4.40mm, Pitch 0.65mm, IPC Medium Density"
  oval 1.55x0.35 smd: 1(-2.875,3.575) 2(-2.875,2.925) 3(-2.875,2.275) 4(-2.875,1.625) 5(-2.875,0.975) 6(-2.875,0.325) 7(-2.875,-0.325) 8(-2.875,-0.975) 9(-2.875,-1.625) 10(-2.875,-2.275) 11(-2.875,-2.925) 12(-2.875,-3.575) 13(2.875,-3.575) 14(2.875,-2.925) 15(2.875,-2.275) 16(2.875,-1.625) 17(2.875,-0.975) 18(2.875,-0.325) 19(2.875,0.325) 20(2.875,0.975) 21(2.875,1.625) 22(2.875,2.275) 23(2.875,2.925) 24(2.875,3.575)
  silkscreen extent -3,-3.95 1.7,4.42, body extent -2.25,-3.95 2.25,3.95, height 2.65
ADuM4160 [mm] "SOIC, 16-Leads, Body 10.30x7.50mm, Pitch 1.27mm, IPC Medium Density"
  oval 2.3x0.6 smd: 1(-4.575,4.445) 2(-4.575,3.175) 3(-4.575,1.905) 4(-4.575,0.635) 5(-4.575,-0.635) 6(-4.575,-1.905) 7(-4.575,-3.175) 8(-4.575,-4.445) 9(4.575,-4.445) 10(4.575,-3.175) 11(4.575,-1.905) 12(4.575,-0.635) 13(4.575,0.635) 14(4.575,1.905) 15(4.575,3.175) 16(4.575,4.445)
  silkscreen extent -4.7,-5.25 3.03,5.42, body extent -3.8,-5.25 3.8,5.25, height 2.65
B3F-31XX [mil]
  oct 70x70 hole 40: 1(-89,-49) 2(89,-49)
  round 100 hole 59: 3(-138,49) 4(138,49)
  silkscreen extent -145,-150 145,10, body extent -165,-200 165,109, height 303
BLM18PG121SN1D [mm] "Chip Inductor, 2-Leads, Body 1.0x0.5mm, IPC Medium Density"
  rect 0.8x0.6 smd: 1(-0.6,0) 2(0.6,0)
  body extent -0.52,-0.28 0.53,0.27, height 0.6
C0402 [mil]
  rrect40% 22x24 smd: 1(-18.7,0) 2(19,0)
  body extent -20,-10 20,10, height 20
C0603 [mm]
  rrect40% 0.74x1 smd: 1(-0.68,0) 2(0.68,0)
  body extent -0.8,-0.4 0.8,0.4, height 0.8
C0805 [mil]
  rrect50% 52x60 smd: 1(-37.4,0) 2(38,0)
  body extent -40,-30 40,30, height 35
C1206 [mm] "Chip Capacitor, Body 3.2x1.6mm, IPC High Density"
  rect 1.1x1.7 smd: 1(-1.35,0) 2(1.35,0)
  silkscreen extent -0.4,-0.75 0.4,0.75, body extent -1.7,-0.9 1.7,0.9, height 1.3
C1210 [mm] "Chip Capacitor, Body 3.2x2.5mm, IPC High Density"
  rect 1.1x2.6 smd: 1(-1.35,0) 2(1.35,0)
  silkscreen extent -0.4,-1.2 0.4,1.2, body extent -1.7,-1.35 1.7,1.35, height 1.3
DRV8825 [mm] "TSOP, 28-Leads, Body 9.70x4.40mm, Pitch 0.65mm, Thermal Pad 5.22.2x3.10.2mm, IPC Medium Density"
  oval 1.7x0.35 smd: 1(-2.85,4.225) 2(-2.85,3.575) 3(-2.85,2.925) 4(-2.85,2.275) 5(-2.85,1.625) 6(-2.85,0.975) 7(-2.85,0.325) 8(-2.85,-0.325) 9(-2.85,-0.975) 10(-2.85,-1.625) 11(-2.85,-2.275) 12(-2.85,-2.925) 13(-2.85,-3.575) 14(-2.85,-4.225) 15(2.85,-4.225) 16(2.85,-3.575) 17(2.85,-2.925) 18(2.85,-2.275) 19(2.85,-1.625) 20(2.85,-0.975) 21(2.85,-0.325) 22(2.85,0.325) 23(2.85,0.975) 24(2.85,1.625) 25(2.85,2.275) 26(2.85,2.925) 27(2.85,3.575) 28(2.85,4.225)
  rect 3.1x5.22 smd: 29(0,0)
  silkscreen extent -2.97,-4.9 1.6,5.07, body extent -2.25,-4.9 2.25,4.9, height 1.2
F1210_M [mm] "Bournes PTC Fuse"
  rect 1x2.5 smd: 1(-1.5,0) 2(1.5,0)
  silkscreen extent -0.4,-1.3 0.4,1.3, body extent -1.7,-1.35 1.7,1.4, height 0.85
FTSH-105-XX-X-DV [mm] "1.27mm pitch, 10 pin, terminal strip; vertical, SMT"
  rect 0.75x2.8 smd mask+0: 1(2.54,2.03) 2(2.54,-2.03) 3(1.27,2.03) 4(1.27,-2.03) 5(0,2.03) 6(0,-2.03) 7(-1.27,2.03) 8(-1.27,-2.03) 9(-2.54,2.03) 10(-2.54,-2.03)
  silkscreen extent 3.28,3.03 3.52,3.27
IRLML6346 [mm] "SOT23, 3-Leads, Body 2.92x2.37mm, Pitch 0.95mm, IPC Medium Density"
  rect 1.6x0.6 smd: 1(-0.9,0.95) 2(-0.9,-0.95) 3(0.9,0)
  silkscreen extent -1.02,-1.5 0.7,1.92, body extent -0.7,-1.52 0.7,1.52, height 1.12
J1-0603 [mm] "Chip Resistor, Body 1.6x0.8mm, IPC High Density"
  rect 0.7x0.9 smd: 1(-0.75,0) 2(0.75,0)
  silkscreen extent -0.2,-0.35 0.2,0.35, body extent -0.85,-0.48 0.85,0.48, height 0.9
MSTBV4 [mil]
  oval 82.5x165 hole 55: 1(-300,0) 2(-100,0) 3(100,0) 4(300,0)
  silkscreen extent -425,-150 425,180, body extent -428,-153 428,183, height 472
"Panasonic VS C" [mm]
  rect 3x1.4 smd: 1(5.348,2.921) 2(0.748,2.921)
  silkscreen extent 0.05,0.22 6.05,5.62, body extent 0.1,0.29 6,5.59, height 5.41
PMEG2005AEV115 [mm] "SOT23, 6-Leads, Body 1.7x1.7mm (max), Pitch 0.50mm, IPC Medium Density"
  rect 0.7x0.3 smd: 1(-0.75,0.5) 2(-0.75,0) 3(-0.75,-0.5) 4(0.75,-0.5) 5(0.75,0) 6(0.75,0.5)
  silkscreen extent -0.87,-0.85 0.1,1.32, body extent -0.65,-0.85 0.65,0.85, height 0.6
PN61729 [mil]
  oct 66x66 hole 38: 1(50,186) 2(-49.21,186) 3(-49.21,107) 4(50,107)
  round 130.5 hole 87: 5(-236.22,0) 6(237,0)
  silkscreen extent -232,-400 233,221, body extent -237,-405 238,226, height 406
PSMN7R0-60YS [mm] "TO, 5-Pads, Body 5.15x5.86mm (max), IPC Medium Density"
  rect 1.8x0.6 smd: 1(-2.6,1.905) 2(-2.6,0.635) 3(-2.6,-0.635) 4(-2.6,-1.905)
  rect 4.8x4.5 smd: 5(1.14,0)
  silkscreen extent -2.72,2.63 -2.47,2.88, body extent -1.85,-2.5 2.25,2.5, height 1.2
R0402 [mil]
  rrect40% 22x24 smd: 1(-18.9,0) 2(19,0)
  body extent -20,-10 20,10, height 14
R0603 [mm]
  rrect40% 0.74x1 smd: 1(-0.68,0) 2(0.68,0)
  body extent -0.8,-0.4 0.8,0.4, height 0.8
Resistor2512 [mm]
  rect 1.6x3.1 smd: 1(-3.25,0) 2(3.25,0)
  silkscreen extent -2.26,-1.3 2.26,1.3, body extent -3.24,-1.4 3.24,1.4, height 0.9
"RGY  (S-PVQFN-N14)" [mm] "QFN, 16-Leads, Body 3.50x3.50mm, Pitch 0.50mm, Thermal Pad 2.00x2.00mm, IPC Medium Density"
  oval 0.8x0.2 smd: 1(-1.75,0.5) 7(1.75,0.5) 8(1.75,-0.5) 14(-1.75,-0.5)
  oval 0.2x0.8 smd: 2(-1,1.75) 3(-0.5,1.75) 4(0,1.75) 5(0.5,1.75) 6(1,1.75) 9(1,-1.75) 10(0.5,-1.75) 11(0,-1.75) 12(-0.5,-1.75) 13(-1,-1.75)
  rect 2x2 smd: 15(0,0)
  silkscreen extent -2.75,-1.97 1.97,1.97, body extent -1.83,-1.83 1.83,1.83, height 1
SK310A-TP [mm] "Molded Diode, 2-Leads, Body 4.31x2.69mm, IPC Medium Density"
  rect 2.3x2.15 smd: 1(-1.625,0) 2(1.625,0)
  silkscreen extent -2.3,-1.45 3.07,1.75, body extent -2.29,-1.42 2.28,1.42, height 2.95
"SM 0805 - gap trimmed" [mm]
  rect 1x1.5 smd: 1(-1.1,0) 2(1.1,0)
  silkscreen extent -0.36,-0.64 0.35,0.63
"SM 0805 polarized" [mm]
  rect 1x1.5 smd: 1(0.93,-1.105) 2(3.13,-1.105)
  silkscreen extent 0.1,-1.9 2.38,-0.3
SMA-SM [mil]
  rect 79x79 smd: A(79,0) C(-78.74,0)
  silkscreen extent -89,-49 89,50, body extent -105,-54 105,55, height 116
SOT95P230X110-3N [mm] "SOT23, 3-Leads, Body 2.90x2.30mm, Pitch 0.95mm, IPC Medium Density"
  rect 1.4x0.6 smd: 1(-0.95,0.95) 2(-0.95,-0.95) 3(0.95,0)
  silkscreen extent -1.07,-1.5 0.7,1.92, body extent -0.7,-1.5 0.7,1.5, height 1.1
SOT230P700X190-4N [mm] "SOT223, 4-Leads, Body 6.50x7.00mm (avg), Pitch 2.30mm, IPC Medium Density"
  rect 2.4x1 smd: 1(-2.9,2.3) 2(-2.9,0) 3(-2.9,-2.3)
  rect 2.4x3.25 smd: 4(2.9,0)
  silkscreen extent -3.02,-3.35 1.4,3.47, body extent -1.85,-3.35 1.85,3.35, height 1.9
SZMM3Z4V7T1G [mm] "Molded Diode, 2-Leads, Body 1.70x1.25mm, IPC Medium Density"
  rect 0.9x0.35 smd: 1(-1,0) 2(1,0)
  silkscreen extent -0.95,-0.7 1.4,0.7, body extent -0.9,-0.67 0.9,0.67, height 1
"Ti DCU (R-PDSO-G8) SOIC - SN74VC1G139" [mm] "TSSOP, 8-Leads, Body 2.00x2.30mm, Pitch 0.50mm, IPC Medium Density"
  oval 0.8x0.3 smd: 1(-1.6,0.75) 2(-1.6,0.25) 3(-1.6,-0.25) 4(-1.6,-0.75) 5(1.6,-0.75) 6(1.6,-0.25) 7(1.6,0.25) 8(1.6,0.75)
  silkscreen extent -1.72,-1.05 0.8,1.58, body extent -1.2,-1.05 1.2,1.05, height 0.9
TP-2#1 [mil]
  round 50 smd: 1(0,0)
TP-2#2 [mil]
  round 50 smd far side: 1(0,0)
TSQFP50P900X900X120-48N [mm] "TSQFP, 48-Leads, Body 7.00x7.00mm, Pitch 0.50mm, IPC Medium Density"
  oval 1.4x0.3 smd: 1(-4.2,2.75) 2(-4.2,2.25) 3(-4.2,1.75) 4(-4.2,1.25) 5(-4.2,0.75) 6(-4.2,0.25) 7(-4.2,-0.25) 8(-4.2,-0.75) 9(-4.2,-1.25) 10(-4.2,-1.75) 11(-4.2,-2.25) 12(-4.2,-2.75) 25(4.2,-2.75) 26(4.2,-2.25) 27(4.2,-1.75) 28(4.2,-1.25) 29(4.2,-0.75) 30(4.2,-0.25) 31(4.2,0.25) 32(4.2,0.75) 33(4.2,1.25) 34(4.2,1.75) 35(4.2,2.25) 36(4.2,2.75)
  oval 0.3x1.4 smd: 13(-2.75,-4.2) 14(-2.25,-4.2) 15(-1.75,-4.2) 16(-1.25,-4.2) 17(-0.75,-4.2) 18(-0.25,-4.2) 19(0.25,-4.2) 20(0.75,-4.2) 21(1.25,-4.2) 22(1.75,-4.2) 23(2.25,-4.2) 24(2.75,-4.2) 37(2.75,4.2) 38(2.25,4.2) 39(1.75,4.2) 40(1.25,4.2) 41(0.75,4.2) 42(0.25,4.2) 43(-0.25,4.2) 44(-0.75,4.2) 45(-1.25,4.2) 46(-1.75,4.2) 47(-2.25,4.2) 48(-2.75,4.2)
  silkscreen extent -4.32,-3.1 3.1,3.57, body extent -3.5,-3.5 3.5,3.5, height 1.2
VSSOP10 [mm] "TSSOP, 10-Leads, Body 3.15x3.00mm, Pitch 0.50mm, Thermal Pad 2.05.2x1.50.2mm, IPC High Density"
  rect 1.02x0.3 smd mask+0.102: 1(-2.4,1) 2(-2.4,0.5) 3(-2.4,0) 4(-2.4,-0.5) 5(-2.4,-1) 6(2.4,-1) 7(2.4,-0.5) 8(2.4,0) 9(2.4,0.5) 10(2.4,1)
  rect 1.73x1.9 smd: 11(0,0)
  silkscreen extent -2.02,-1.7 0.65,1.82, body extent -1.55,-1.7 1.55,1.7, height 1.09
XAL50xx-153 [mm] "Precision Wire Wound Inductor, 2-Leads, Body 5.28x5.48mm, IPC High Density"
  rect 2.05x4.2 smd: 1(-2,0) 2(2,0)
  silkscreen extent -2.75,-2.85 2.75,2.85, body extent -2.74,-2.84 2.74,2.84, height 4.25

## Part data
C1A C1B C1C C1D C2A C2B C2C C2D C4A C4B C4C C4D C5A C5B C5C C6A C6B C6C C7 C8 C9 C10 C11 C12 C13 C14 C15 C16 C17 C18 C19 C20 C21 C22 C23 C24 C25 C26 C28 C29 C30 C31 C39 C40 C41 C42 C43 C44 C46 C47 C49 C50 C51 C52: library part "Cap Semi", "Capacitor (Semiconductor SIM Model)"
C3A C3B C3C C3D: library part "Cap Pol1", "Polarized Capacitor (Radial)"
C27 C48A C48B: "Capacitor (Semiconductor SIM Model)"
C32: library part C1206C475K5PACTU, "CAP CER 1206 4.7uF 50V 10% X5R"
C33 C35: library part C0603C104K5RACTU, "CAP CER 0603 100nF 50V 10% X7R"
C34: library part GRM21BR71H105KA12L, "CAP CER 0805 1uF 50V 10% X7R"
C36 C45: library part "Cap Pol3", "Polarized Capacitor (Surface Mount)"
C37: library part C0805C106K8PACTU, "CAP CER 0805 10uF 10V 10% X5R"
C38: library part GRM155R60J105KE19D, "CAP CER 0402 1uF 6.3V 10% X5R"
D1 D2 D3 D5: "Typical RED GaAs LED"
D4 D6 D9 D11: library part "D Schottky", "Schottky Diode"
D7: library part SK310A, "DIODE Schottky 3A SMA"
D8 D12: "Typical RED, GREEN, YELLOW, AMBER GaAs LED"
D10: library part "D Zener", "Zener Diode"
D13A D13B D14A D14B: "High Conductance Fast Diode"
DA1 DA3A DA3B DA3C: "PESDxL2BT TVS Diode Array 2x"
F1 F2 F3: library part "Fuse 1", "Fuse"
JTAG/DEBUG1: library part "ARM Cortex JTAG-DEBUG Header"
L1: "IND 15uH 3.9A 20%"
M1A M1B M1C M1D: library part "Molex 0705430003 Alt", "Molex 4 Pin Clip Connector"
MAX1A MAX1B MAX1C MIN1A MIN1B MIN1C: library part "Molex Endstop"
MOSFETS "PWR INPUT": library part con-phoenix-508_4
Q1 Q2 Q3 Q4: "N-Channel MOSFET"
R1A R1B R1C R1D R2A R2B R2C R2D R3A R3B R3C R3D R4A R4B R4C R5A R5B R5C R7 R8 R9 R10 R13 R14 R15 R16 R17 R18 R19 R20 R21 R22 R23 R24: library part Res3, "Resistor"
R6 R11 R12 R26 R31 R32 R33 R34A R34B R35A R35B: "Resistor"
R25: library part CRCW0402200KFKED, "RES 0402 22r 63mW 1%"
R27 R29 R30: library part ERJ-3EKF1002V, "RES 0603 10K 100mW 1%"
R28: library part RL2512FK-070R06L, "RES 0.06 OHM 1W 1% 2512 SMD"
S1: library part 1571610-2_1, "SWTCH Momentary Washable"
TP1A TP1B TP1C TP1D TP2A TP2B TP2C TP2D TP3A TP3B TP3C TP3D TP4A TP4B TP4C TP4D TP5A TP5B TP5C TP5D TP6A TP6B TP6C TP6D TP7A TP7B TP7C TP7D TP8A TP8B TP8C TP9A TP9B TP9C TP10 TP11 TP12 TP13 TP14 TP15 TP16 TP17 TP18 TP19A TP19B: library part Socket, "Socket"
U1A U1B U1C U1D: "DRV8825 Ti Stepper Driver"
U7: "USB Opto Isolator"
U8: library part TXS0104E, "TXS0104E - Bidriectional Opendrain/pushpull level shift"
U9: library part LM25011, "REG BUCK"

## Free pads (board coordinates)
  round 275.59 hole 118.11: 0(5459.25,5360.63) 1(5459.25,7762.2) 2(1719.09,7762.2) 3(1719.09,5360.63)
  rect 150x150 hole 100: ""(1805,1120) ""(5770,1120)

## Via types
v1: diameter 19.68, hole 7.87, Top Layer to Bottom Layer, 64 vias
v2: diameter 25, hole 15, Top Layer to Bottom Layer, tented both sides, 52 vias
v3: diameter 30, hole 15, Top Layer to Bottom Layer, tented both sides, 27 vias
v4: diameter 50, hole 28, Top Layer to Bottom Layer, tented both sides, 12 vias
v5: diameter 30, hole 15, Top Layer to Bottom Layer, 9 vias
v6: diameter 45, hole 20, Top Layer to Bottom Layer, tented both sides, 1 vias